# EAGLE board 7seg_snd2537 (EAGLE 7.1.0)
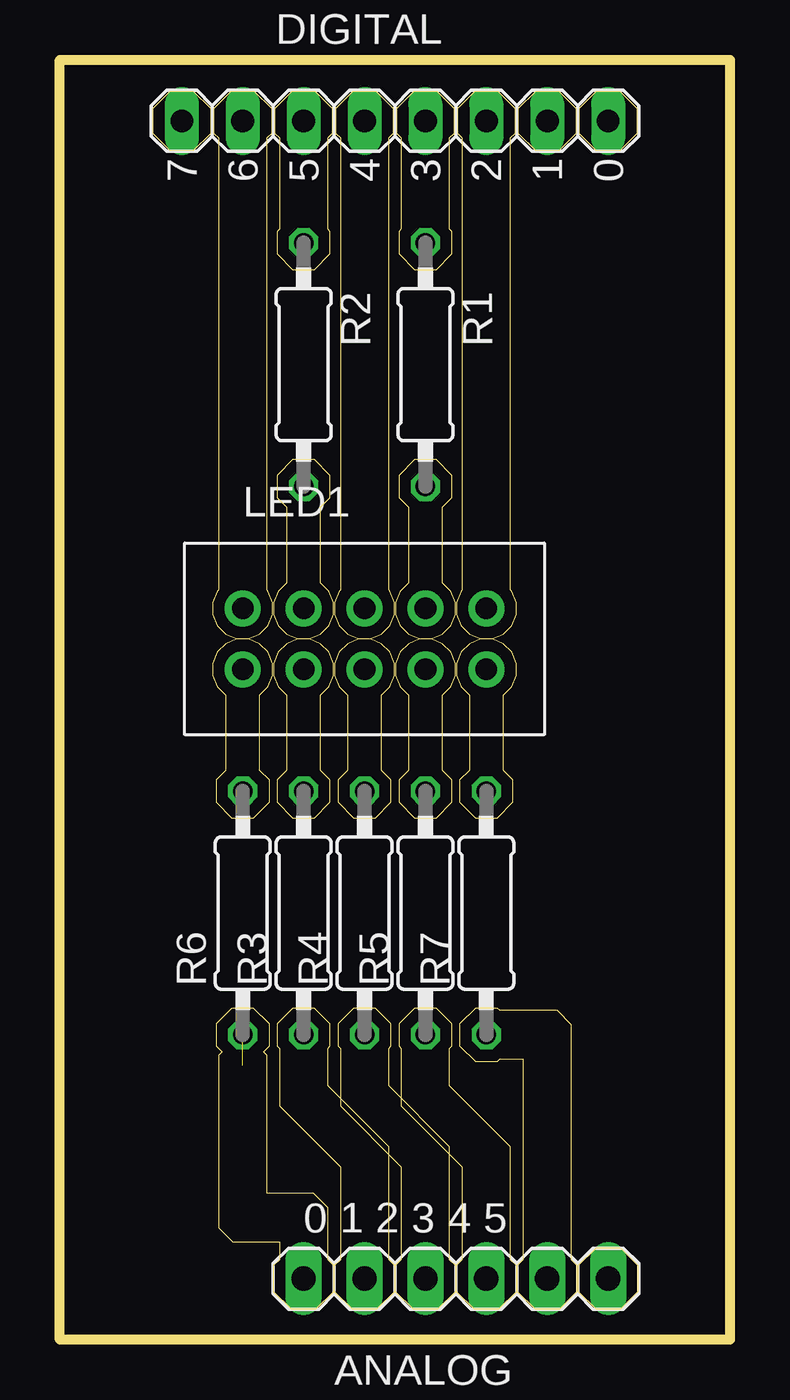
[diagram p0: board, top side]
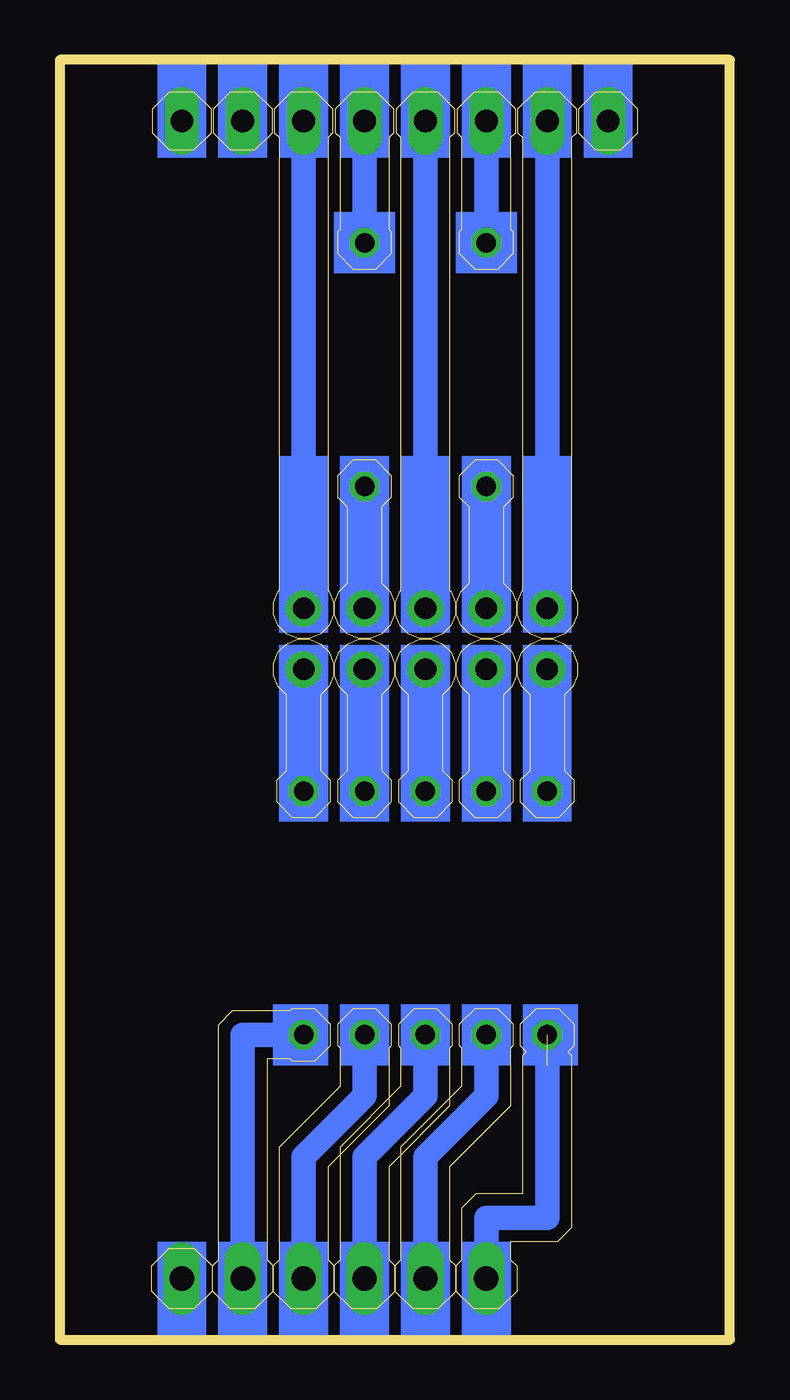
[diagram p1: board, bottom side, seen from below]

Size 27.94 x 53.34 mm. Coordinates in mm from the lower left corner, seen from the top.
Outline: 0,0 0,53.34 27.94,53.34 27.94,0 0,0
Copper layers (1*16): Top 0.035mm / dielectric 1.53mm / Bottom 0.035mm
Design rules "pban_4mil-l2": minimum track width 0.1mm, minimum drill 0.3mm, track to track 0.1mm, track to pad 0.229mm, pad to pad 0.1mm, via to via 0.1mm, smd to smd 0.1mm, copper to edge 0.5mm, drill to drill 0.5mm, minimum pad ring 0.15mm, minimum via ring 0.15mm, stop-mask expansion 4mil, vias tented up to drill 0.35mm, thermal gap 10mil
Milling: 401 lines

## Footprints (pad centres in the part's own frame; a part is rotated, then mirrored left to right if it is on the bottom)
1X06 = drill 1.016 long: 1 -6.35,0; 2 -3.81,0; 3 -1.27,0; 4 1.27,0; 5 3.81,0; 6 6.35,0
1X08-TH = drill 0.95 pad 1.422 long: 1 -8.89,0; 2 -6.35,0; 3 -3.81,0; 4 -1.27,0; 5 1.27,0; 6 3.81,0; 7 6.35,0; 8 8.89,0
SND2537-PKG = drill 0.9 pad 1.5: 1 -5.08,-1.27; 2 -2.54,-1.27; 3 0,-1.27; 4 2.54,-1.27; 5 5.08,-1.27; 6 5.08,1.27; 7 2.54,1.27; 8 0,1.27; 9 -2.54,1.27; 10 -5.08,1.27
0207/10 = drill 0.813 octagon: 1 -5.08,0; 2 5.08,0

## Placement (x,y rotation side)
ANALOG  [1X06]  16.51,2.54 0 top
DIGITAL  [1X08-TH]  13.97,50.8 180 top
LED1  SND2537  [SND2537-PKG]  12.7,29.21 0 top
R1  [0207/10]  15.24,40.64 270 top
R2  [0207/10]  10.16,40.64 270 top
R3  [0207/10]  10.16,17.78 90 top
R4  [0207/10]  12.7,17.78 90 top
R5  [0207/10]  15.24,17.78 90 top
R6  [0207/10]  7.62,17.78 90 top
R7  [0207/10]  17.78,17.78 90 top

## Library data of the parts
ANALOG = pinhead
DIGITAL = SmartPrj
LED1 = led-7-seg-samkwang; OC_FARNELL: unknown; OC_NEWARK: unknown
R1-R7 = resistor

## Nets
A0: ANALOG.1 R6.1
A1: ANALOG.2 R3.1
A2: ANALOG.3 R4.1
A3: ANALOG.4 R5.1
A4: ANALOG.5 R7.1
A5: ANALOG.6
N$9: LED1.7 R1.2
N$10: LED1.9 R2.2
N$11: LED1.2 R3.2
N$12: LED1.3 R4.2
N$13: LED1.4 R5.2
N$14: LED1.1 R6.2
N$15: LED1.5 R7.2
P0: DIGITAL.1
P1: DIGITAL.2
P2: DIGITAL.3 LED1.6
P3: DIGITAL.4 R1.1
P4: DIGITAL.5 LED1.8
P5: DIGITAL.6 R2.1
P6: DIGITAL.7 LED1.10
P7: DIGITAL.8

## Tracks (layer width: path | path; a pad name or v marks a point on that pad's centre or on a via)
A0  (1 unrouted)
  Bottom 1.016: 7.62,11.43 7.62,5.08 10.16,5.08 ANALOG.1
A1
  Bottom 1.016: R3.1 10.16,10.16 12.7,7.62 ANALOG.2
A2
  Bottom 1.016: R4.1 12.7,10.16 15.24,7.62 ANALOG.3
A3
  Bottom 1.016: R5.1 15.24,10.16 17.78,7.62 ANALOG.4
A4
  Bottom 1.016: R7.1 20.32,12.7 ANALOG.5
N$9
  Bottom 0.406: R1.2 LED1.7
N$10
  Bottom 0.406: R2.2 LED1.9
N$11
  Bottom 0.406: LED1.2 R3.2
N$12
  Bottom 0.406: LED1.3 R4.2
N$13
  Bottom 0.406: LED1.4 R5.2
N$14
  Bottom 0.406: LED1.1 R6.2
N$15
  Bottom 0.406: LED1.5 R7.2
P2
  Bottom 1.016: DIGITAL.3 LED1.6
P3
  Bottom 1.016: DIGITAL.4 R1.1
P4
  Bottom 1.016: DIGITAL.5 LED1.8
P5
  Bottom 1.016: DIGITAL.6 R2.1
P6
  Bottom 1.016: DIGITAL.7 LED1.10
(copper drawn outside any net)
  shapes: Bottom area x31

## Text on the board
tPlace: 7 | 6 | 5 | 4 | 3 | 2 | 1 | 0
tNames: 0 1 2 3 4 5
bStop: 7 | 6 | 5 | 4 | 3 | 2 | 1 | 0 | 0 | 1 | 2 | 3 | 4 | 5